# Altium PCB SmartSwitch2.0.PcbDoc
Units mil, origin at the board's own origin, x right, y up, seen from the top; angles counter-clockwise.
Board outline 5118.11 x 4173.23 mil, 2 copper layers (Top Layer, Bottom Layer); 68 components, 39 nets, 191 pads, 146 vias.
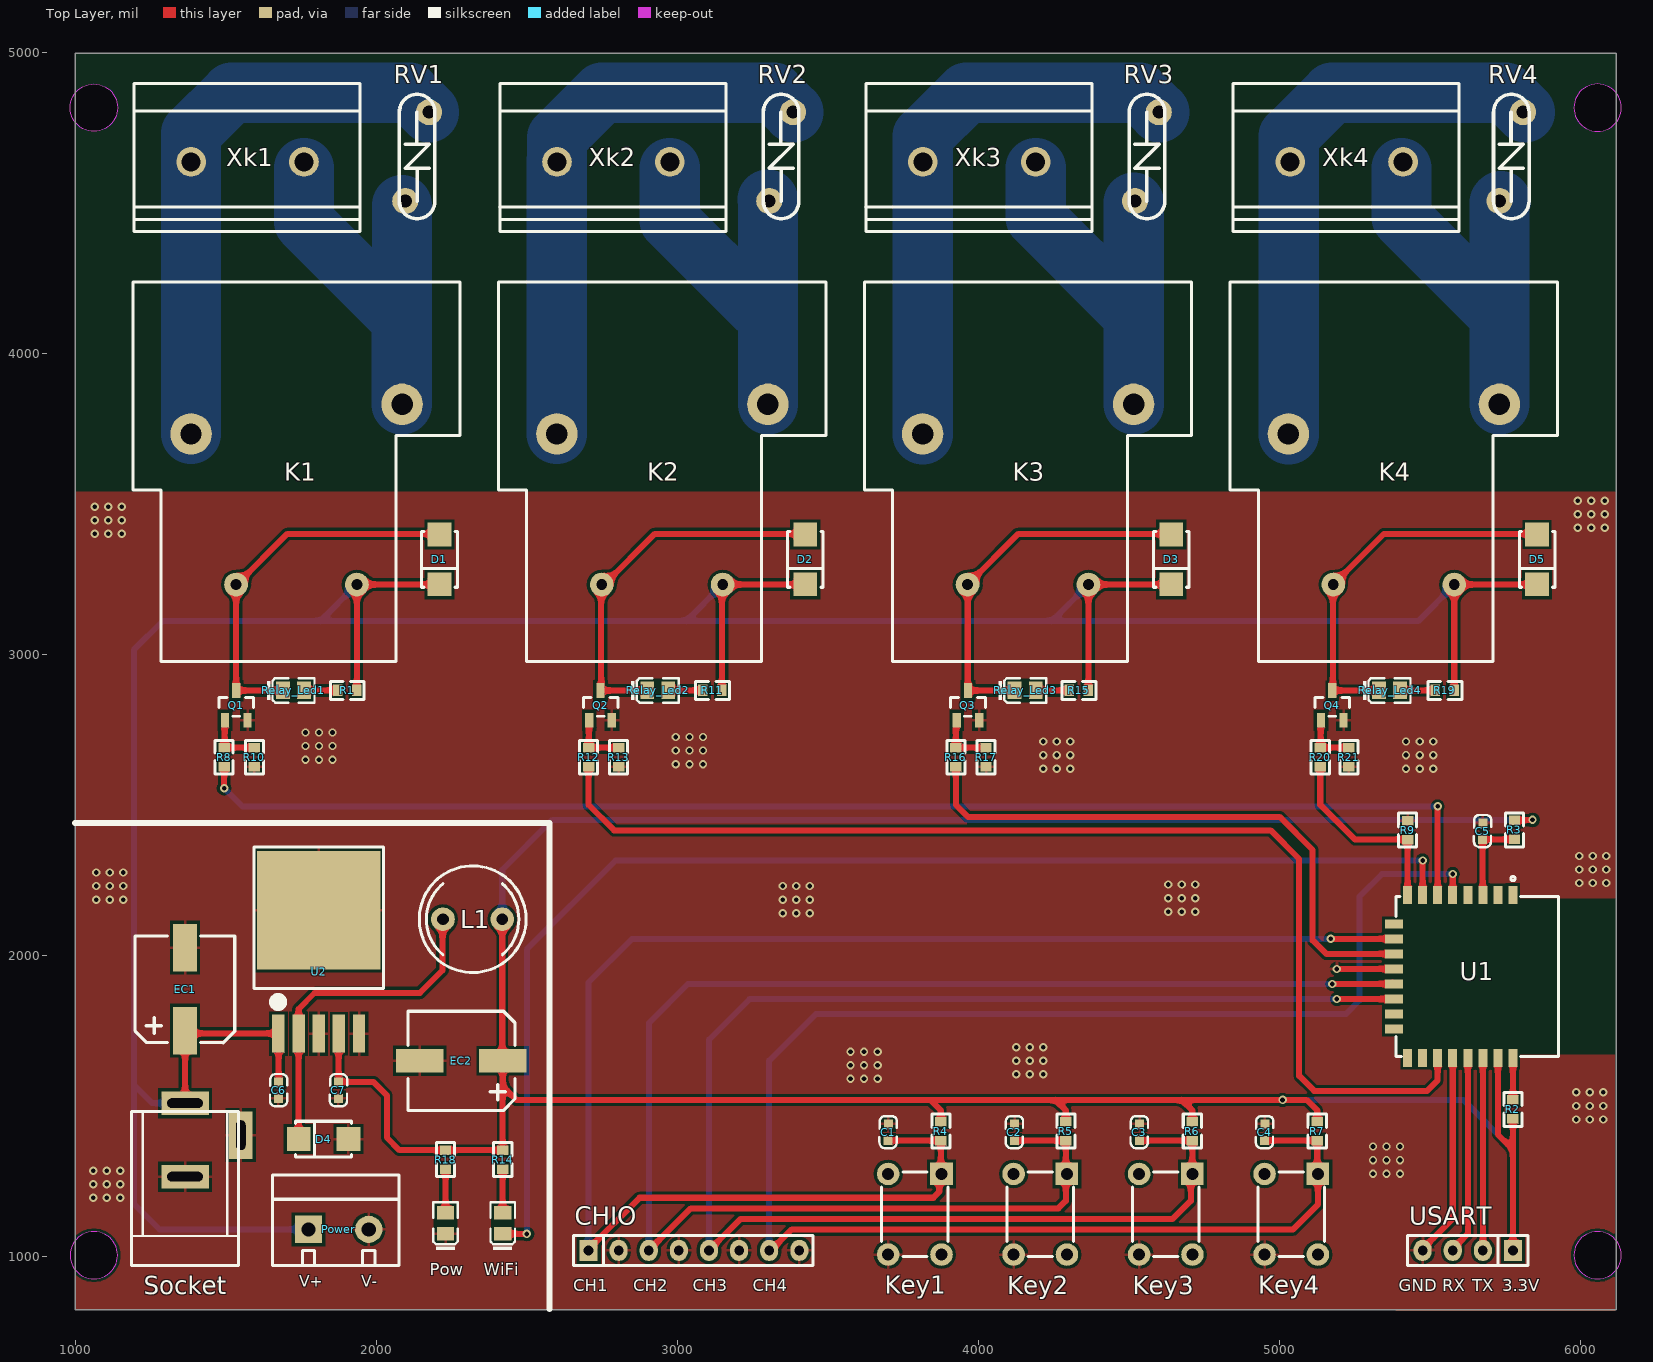
[diagram p0: Top Layer view]
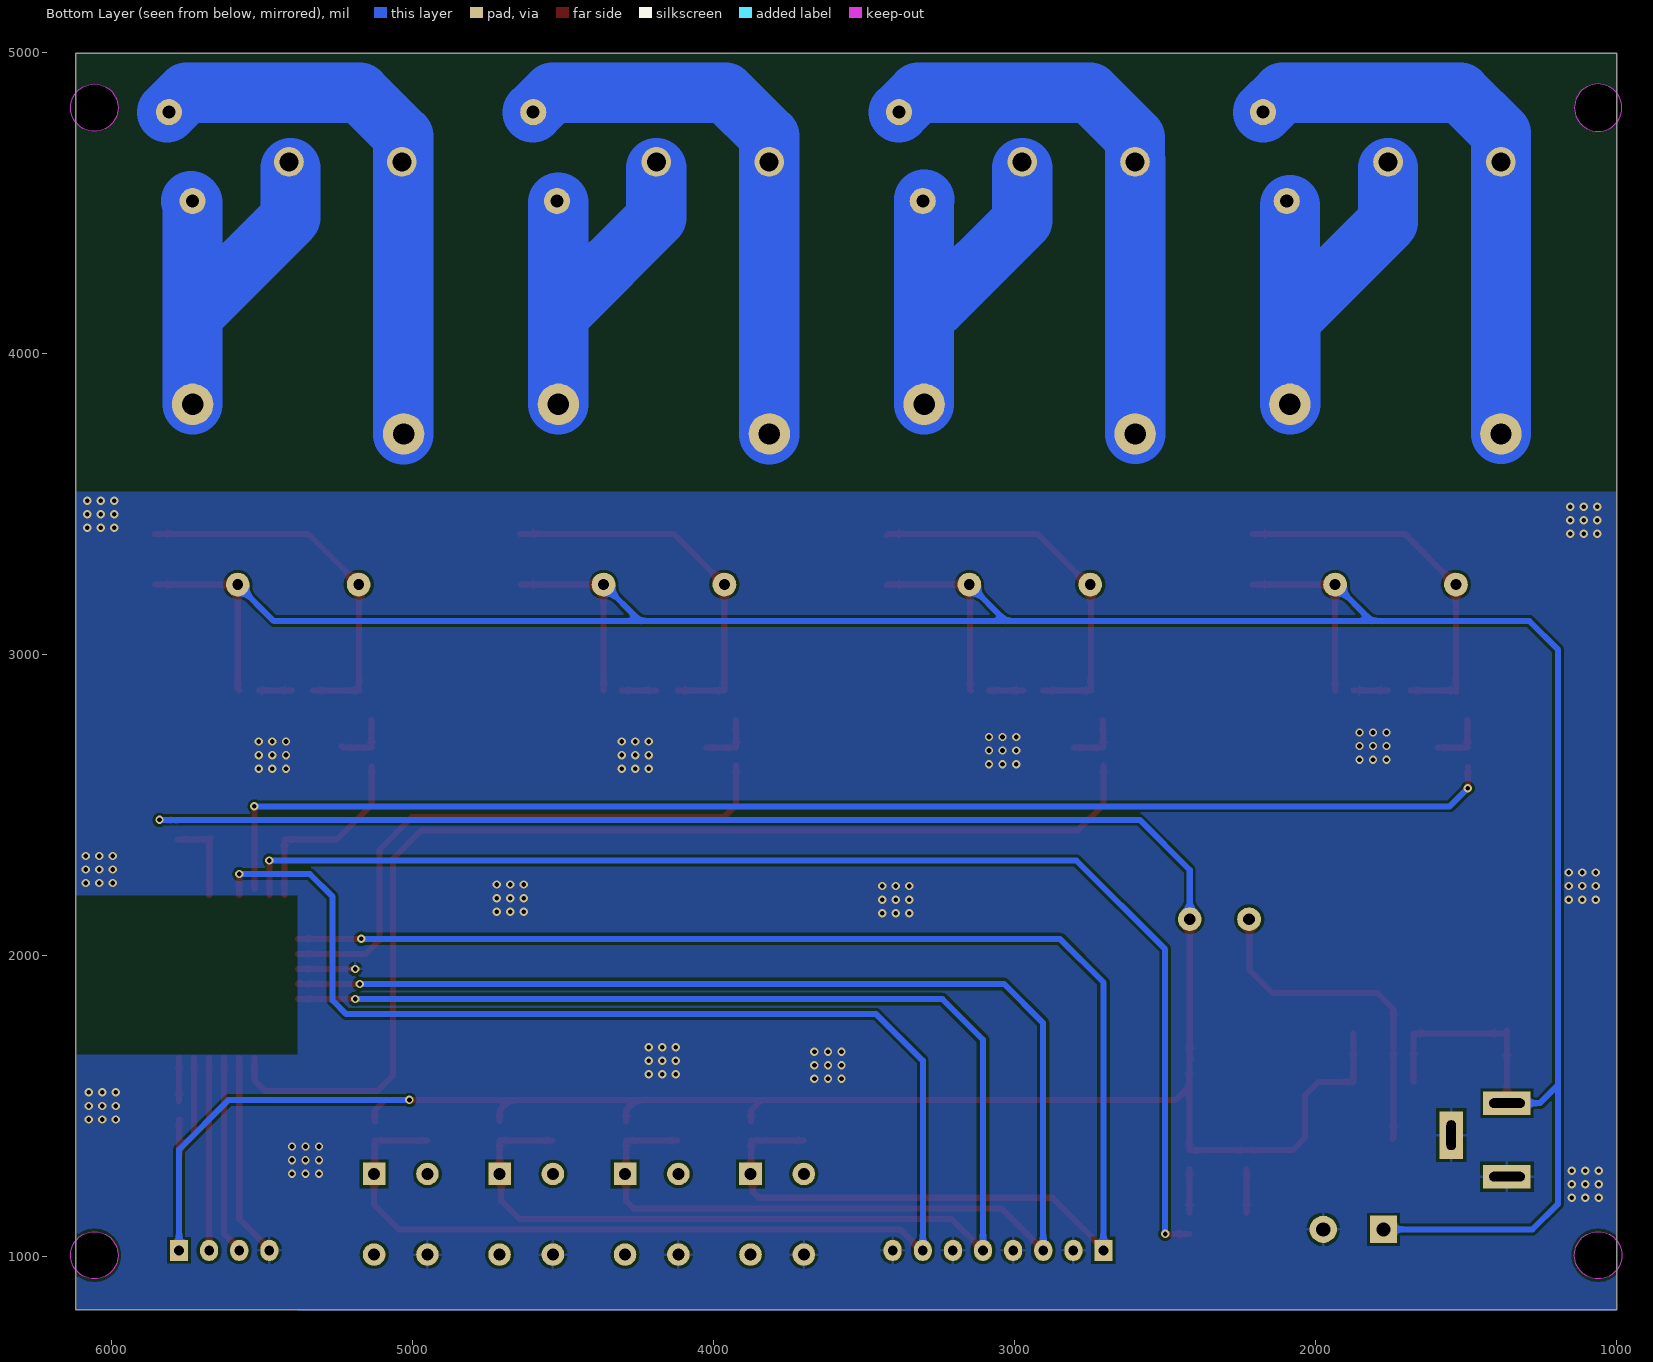
[diagram p1: Bottom Layer view, seen from below]

## Layer stack, top to bottom
Top Solder: solder mask 0.4, Solder Resist, Dk 3.5
Top Layer: signal copper 1.4
Dielectric 1: dielectric 12.6, FR-4, Dk 4.8
Bottom Layer: signal copper 1.4
Bottom Solder: solder mask 0.4, Solder Resist, Dk 3.5

## Board outline
1000,822.99 1000,4996.22 6118.11,4996.22 6118.11,822.99
cut-out: 5977.17,4815.12 ccw(c6055.91,4815.12) 6055.91,4736.38 ccw(c6055.91,4815.12) 6134.65,4815.12 ccw(c6055.91,4815.12) 6055.91,4893.86 ccw(c6055.91,4815.12)
cut-out: 5977.17,1004.09 ccw(c6055.91,1004.09) 6055.91,925.35 ccw(c6055.91,1004.09) 6134.65,1004.09 ccw(c6055.91,1004.09) 6055.91,1082.83 ccw(c6055.91,1004.09)
cut-out: 983.46,1004.09 ccw(c1062.2,1004.09) 1062.2,925.35 ccw(c1062.2,1004.09) 1140.94,1004.09 ccw(c1062.2,1004.09) 1062.2,1082.83 ccw(c1062.2,1004.09)
cut-out: 1062.2,4736.38 cw(c1062.2,4815.12) 983.46,4815.12 cw(c1062.2,4815.12) 1062.2,4893.86 cw(c1062.2,4815.12) 1140.94,4815.12 cw(c1062.2,4815.12)

## Design rules (kind name [scope] priority, off if disabled: settings)
Clearance [All] p1: gap=10 ignorepadtopadclearanceinfootprint=FALSE except(0: Arc-Hole Track-Hole SMDPad-Hole THPad-Hole Via-Hole Fill-Hole Poly-Hole Region-Hole Text-Hole)
PolygonConnect [All] p1: connectstyle=Relief reliefconductorwidth=10 reliefentries=4 polygonreliefangle="90 Angle" airgapwidth=10
RoutingVias [All] p1: holewidth=15.75 width=27.56 viastyle="Through Hole" minholewidth=15.75 minwidth=27.56 maxholewidth=15.75 maxwidth=27.56
SolderMaskExpansion [All] p1: expansion=4
Width [All] p1: maxlimit=200 minlimit=10 preferedwidth=10 minimp=50.000000 maximp=50.000000 favimp=50.000000
30 further rules are at their usual default settings.

## Components (designator, comment, footprint, x,y, rotation, side; value= is the part's Value field where it differs from the comment)
C1 "1nF" 0603C 3701.35,1440.21 r270 top
C2 "1nF" 0603C 4120.35,1440.21 r270 top
C3 "1nF" 0603C 4535.35,1440.21 r270 top
C4 "1nF" 0603C 4951.35,1440.21 r270 top
C5 "100nF" 0603C 5675.35,2440.21 r270 top
C6 "100nF" 0603C 1674.65,1524.79 r90 top
C7 "100nF" 0603C 1873.65,1524.79 r90 top
CHIO "Pin HDR1X8" "Pin HDR1X8/2.54mm-S" 2705,1020 r90 top
D1 "M7" SMA(DO-214AC)_S1 2210,3315 r90 top
D2 "M7" SMA(DO-214AC)_S1 3425,3315 r90 top
D3 "M7" SMA(DO-214AC)_S1 4640,3315 r90 top
D4 "SS34" SMA(DO-214AC)_S1 1825,1390 r0 top
D5 "M7" SMA(DO-214AC)_S1 5855,3315 r90 top
EC1 "470uF" SMD-EC8X8X10 1360,2020 r90 top
EC2 "470uF" SMD-EC8X8X10 2150,1645 r180 top
K1 "SRD-12V" SLA-xxVDC-SL-A 1735,3605.59 r0 top
K2 "SRD-12V" SLA-xxVDC-SL-A 2949.74,3605.59 r0 top
K3 "SRD-12V" SLA-xxVDC-SL-A 4164.48,3605.59 r0 top
K4 "SRD-12V" SLA-xxVDC-SL-A 5379.21,3605.59 r0 top
Key1 "KEY" DIP-6X6X4.3 3877.17,1274.12 r270 top
Key2 "KEY" DIP-6X6X4.3 4293.83,1274.12 r270 top
Key3 "KEY" DIP-6X6X4.3 4710.5,1274.12 r270 top
Key4 "KEY" DIP-6X6X4.3 5127.17,1274.12 r270 top
L1 "150uH" PK0810 2320,2120 r0 top
Pow "红灯 0805" 0805_LED_S1 2230,1110.16 r90 top
Power "KF301-2P" KF301-5.0-2P 1775,1090 r0 top
Q1 "SS8050 Y1" SOT-23(SOT-23-3) 1535,2830 r270 top
Q2 "SS8050 Y1" SOT-23(SOT-23-3) 2745,2830 r270 top
Q3 "SS8050 Y1" SOT-23(SOT-23-3) 3965,2830 r270 top
Q4 "SS8050 Y1" SOT-23(SOT-23-3) 5175,2830 r270 top
R1 "1.2K" 0603R 1935,2880 r180 top
R2 "10k" 0603R 5775,1457.01 r90 top
R3 "10k" 0603R 5780,2385 r90 top
R4 "10k" 0603R 3875,1447.99 r270 top
R5 "10k" 0603R 4290,1447.99 r270 top
R6 "10k" 0603R 4710,1447.99 r270 top
R7 "10k" 0603R 5125,1447.99 r270 top
R8 "1K" 0603R 1495,2627.01 r90 top
R9 "4.7K" 0603R 5425,2447 r270 top
R10 "4.7K" 0603R 1595,2627.01 r90 top
R11 "1.2K" 0603R 3147.99,2880 r180 top
R12 "1K" 0603R 2705,2627.01 r90 top
R13 "4.7K" 0603R 2805,2627.01 r90 top
R14 "1K" 0603R 2420,1352.99 r270 top
R15 "1.2K" 0603R 4365,2880 r180 top
R16 "1K" 0603R 3925,2627.01 r90 top
R17 "4.7K" 0603R 4025,2627.01 r90 top
R18 "1K" 0603R 2230,1352.99 r270 top
R19 "1.2K" 0603R 5580,2880 r180 top
R20 "1K" 0603R 5135,2627.01 r90 top
R21 "4.7K" 0603R 5230,2627.01 r90 top
Relay_Led1 "红灯 0805" 0805_LED_S1 1725,2880 r0 top
Relay_Led2 "红灯 0805" 0805_LED_S1 2935,2880 r0 top
Relay_Led3 "红灯 0805" 0805_LED_S1 4155.04,2880 r0 top
Relay_Led4 "红灯 0805" 0805_LED_S1 5365,2880 r0 top
RV1 "7D471K" Varistor-7.5mm 2096.26,4505 r90 top
RV2 "7D471K" Varistor-7.5mm 3305,4505 r90 top
RV3 "7D471K" Varistor-7.5mm 4520,4505 r90 top
RV4 "7D471K" Varistor-7.5mm 5730,4505 r90 top
Socket "DC_Socket" DC-005 1365,1509.09 r270 top
U1 "Comment" "PSF- B04" 6459.92,1929.84 r180 top
U2 "LM2596-3.3" TO263-5A 1808.86,1740 r0 top
USART "TTL" "Pin HDR1X4/2.54mm-S" 5775,1020 r270 top
WiFi "蓝灯 0805" 0805_LED_S1 2420,1110.16 r90 top
Xk1 "XK 9500" "XK 9500" 1569.8,4555 r0 top
Xk2 "XK 9500" "XK 9500" 2785,4555 r0 top
Xk3 "XK 9500" "XK 9500" 4000,4555 r0 top
Xk4 "XK 9500" "XK 9500" 5220,4555 r0 top

## Footprints (in the part's own frame and the unit in brackets; to place one, negate y for a bottom-side part, rotate by r counter-clockwise, add the part's x,y. Pads: shape width x height; smd on the part's side, far side on the other; paste and mask are expansions set on the pad)
0603C [mil]
  rect 30x30 smd: 1(0.21,-0.35) 2(55.21,-1.35)
  silkscreen extent -26,-30 81,28, body extent -1,-15 62,17, height 12
0603R [mm]
  rect 0.8x0.965 smd: 1(0,0) 2(1.6,0)
  silkscreen extent -0.64,-0.76 2.21,0.76, body extent -0.04,-0.41 1.56,0.41, height 0.45
0805_LED_S1 [mm]
  rect 1.16x1.47 smd: A(0.89,0) K(-0.89,0)
  silkscreen extent -2.24,-1.04 1.77,1.03, body extent -1.01,-0.62 1.01,0.62, height 1.1
DC-005 [mm] "5.5X2.1mm"
  rect 2x4 hole 0.8 slot 3 at 90 deg: 1(0,0) 2(6.2,0)
  rect 4x2 hole 0.8 slot 2.5 at 0 deg: 3(2.7,4.7)
  silkscreen extent 0.72,-4.5 13.7,4.5, body extent -0.4,-4.52 13.65,4.78, height 11.2
DIP-6X6X4.3 [mm]
  rect 1.9x1.9 hole 1: 1(0,0)
  round 1.9 hole 1: 2(0,-4.5) 3(6.8,-4.5) 4(6.8,0)
  silkscreen extent -0.16,-5.04 6.96,0.54, body extent -0.66,-5.25 7.55,0.75, height 4.25
KF301-5.0-2P [mm] "可拼接端子/6A"
  rect 2.3x2.3 hole 1.2: 1(0,0)
  round 2.3 hole 1.2: 2(5.08,0)
  silkscreen extent -3.05,-3.05 7.62,4.57, body extent -3,-3.09 7.5,4.51, height 10.05
"Pin HDR1X4/2.54mm-S" [mil]
  rect 70x60 hole 32: 1(0,0)
  oval 70x60 hole 32: 2(0,-100) 3(0,-200) 4(0,-300)
  silkscreen extent -50,-350 50,50, body extent -50,-350 50,50, height 336
"Pin HDR1X8/2.54mm-S" [mil]
  rect 70x60 hole 32: 1(0,0)
  oval 70x60 hole 32: 2(0,-100) 3(0,-200) 4(0,-300) 5(0,-400) 6(0,-500) 7(0,-600) 8(0,-700)
  silkscreen extent -50,-745 50,50, body extent -50,-750 50,50, height 336
PK0810 [mm] "5*9*12mm(脚距，直径，高）"
  round 2 hole 1: 1(-2.5,0) 2(2.5,0)
  silkscreen extent -4.5,-4.5 4.5,4.5, body extent -4.5,-4.55 4.5,4.44, height 12.02
"PSF- B04" [mil]
  rect 29.92x60 smd: 1(684.92,-270.16) 2(734.92,-270.16) 3(784.92,-270.16) 4(834.92,-270.16) 5(884.92,-270.16) 6(934.92,-270.16) 7(984.92,-270.16) 8(1034.92,-270.16) 17(1034.92,270.16) 18(984.92,270.16) 19(934.92,270.16) 20(884.92,270.16) 21(834.92,270.16) 22(784.92,270.16) 23(734.92,270.16) 24(684.92,270.16)
  rect 60x29.92 smd: 9(1080.08,-175) 10(1080.08,-125) 11(1080.08,-75) 12(1080.08,-25) 13(1080.08,25) 14(1080.08,75) 15(1080.08,125) 16(1080.08,175)
  silkscreen extent 533,-332 1073,265
SLA-xxVDC-SL-A [mm] "一组常开，长：32mm，宽：27.6mm，高：20mm"
  round 2 hole 0.9: 1(-5.1,-9.5) 2(5.1,-9.5)
  round 3.5 hole 1.8: 3(8.91,5.7) 4(-8.89,3.2)
  silkscreen extent -13.8,-16 13.8,16, body extent -13.84,-15.87 13.76,16.13, height 20.65
SMA(DO-214AC)_S1 [mm]
  rect 2x2 smd: 1(2.1,0) 2(-2.1,0)
  silkscreen extent -2.35,-1.5 2.35,1.5
SMD-EC8X8X10 [mm]
  rect 4x2 smd: 1(-6.858,-0.127) 2(0.142,-0.127)
  silkscreen extent -7.88,-4.32 1.12,4.08, body extent -8.38,-4.28 1.52,4.02, height 10.2
SOT-23(SOT-23-3) [mm]
  rect 1.25x0.7 smd: 1(1.25,-0.95) 2(1.25,0.95) 3(-1.25,0)
  silkscreen extent -0.65,-1.46 0.9,1.46, body extent -1.5,-1.5 1.5,1.5, height 1.3
TO263-5A [mm] "263，5脚晶体管"
  rect 1.05x3.2 smd: 1(-3.4,0) 2(-1.7,0) 3(0,0) 4(1.7,0) 5(3.4,0)
  rect 10.45x10 smd: 3(0,10.414)
  silkscreen extent -5.46,2.29 5.46,15.75, body extent -5.05,0.45 4.95,13.78, height 4.5
Varistor-7.5mm [mm]
  round 2.2 hole 1.1: 1(0,0) 2(7.5,-2)
  silkscreen extent -1.5,-2.5 9,0.5, body extent -1.6,-2.8 9.1,0.8, height 11.2
"XK 9500" [mm]
  round 2.5 hole 1.6: 1(-4.694,2.032) 2(4.826,2.032)
  silkscreen extent -9.53,-3.84 9.56,8.66, body extent -1.4,4.44 -1.4,4.44, height 0.25

## Part data
C1 C2 C3 C4 C5 C6 C7: library part CAP, "无极性电容"
D1 D2 D3 D5: library part "SMA(DO-214AC) M7", "二极管", Package=SMA(DO-214AC), SuppliersPartNumber=C95872, ComponentLink1Description=供应商, ComponentLink1URL=http://www.szlcsc.com/product/details_2841.html, Supplier=LC, 备注="1N4007 4007 编号C2464 已经停售, 使用新"
D4: library part "SMA(DO-214AC) SS54", "二极管", Package=SMA(DO-214AC), SuppliersPartNumber=C22452, ComponentLink1Description=供应商, ComponentLink1URL=http://www.szlcsc.com/product/details_23178.html, Supplier=LC
EC1 EC2: library part SMD_ECAP, "贴片电解电容"
K1 K2 K3 K4: library part SLA-12VDC-SL-A, "12V一组常开"
L1: library part INDUCTOR, "INDUCTOR"
Pow Relay_Led1 Relay_Led2 Relay_Led3 Relay_Led4: library part "0805 红灯", "发光二极管", Package=0805, SuppliersPartNumber=C2295, ComponentLink1Description=供应商, ComponentLink1URL=http://www.szlcsc.com/product/details_2668.html, Supplier=LC
Q1 Q2 Q3 Q4: library part "SOT-23 SS8050 Y1", "三极管", Package=SOT-23, SuppliersPartNumber=C2150, ComponentLink1Description=供应商, ComponentLink1URL=http://www.szlcsc.com/product/details_2507.html, Supplier=LC
R1 R2 R3 R4 R5 R6 R7 R8 R9 R10 R11 R12 R13 R14 R15 R16 R17 R18 R19 R20 R21: library part RES
RV1 RV2 RV3 RV4: library part Varistor, "压敏电阻"
U2: "DC降压芯片"
USART: library part "Pin HDR1X4"
WiFi: library part "0805 蓝灯", "发光二极管", Package=0805, SuppliersPartNumber=C2293, ComponentLink1Description=供应商, ComponentLink1URL=http://www.szlcsc.com/product/details_2666.html, Supplier=LC

## Via types
v1: diameter 27.56, hole 15.75, Top Layer to Bottom Layer, tented both sides, 146 vias

## Nets (pads, with @x,y where several pads share a name; then routed paths per layer and width w, separated by ;. In a path a pad name is that pad's centre, name@x,y a point inside that pad or via, vN(x,y) a via of type N, cw(c..) or ccw(c..) an arc to the next point about the centre after c; other vN are vias at no path point)
3.3V: C7.2 EC2.1 L1.2 R2.1 R3.2 R4.1 R5.1 R6.1 R7.1 R14.1 R18.1 U1.23 U2.4 USART.1 | length 10339.2
  Top Layer w20: U2.4 1875,1739.21 C7.2 1990,1580 2035,1535 2035,1395 2077.01,1352.99 R18.1 R14.1 2420,1565 ; EC2.1@2415,1655 2418.43,1658.43 L1.2 ; EC2.1 2420,1565 ; 3845,1520 4255,1520 ; R4.1 3875,1485 3840,1520 2465,1520 2420,1565 ; R5.1 4290,1485 4255,1520 ; R6.1 4710,1485 4675,1520 ; R7.1@5122.01,1447.99 R7.1 ; R7.1@5125,1450 5125,1485 5090,1520 v1(5010,1520) 4675,1520 ; U1.23 5725,1405 5775,1355 ; USART.1 5775,1355 ; R2.1@5775,1455 5769.74,1455 5775,1449.74 5775,1355 ; R3.2@5782.99,2445 R3.2 5781,2449 5839,2449 v1(5840,2450) ; 4255,1520 4675,1520
  Bottom Layer w20: L1.2@2415,2115 2415,2116.57 L1.2 2418.43,2283.43 2585,2450 v1(5840,2450) ; v1(5010,1520) 5610,1520 5775,1355 5775,1025 USART.1@5780,1020
12V: C6.2 D1.2 D2.2 D3.2 D5.2 EC1.1 K1.2 K2.2 K3.2 K4.2 Power.1 R1.1 R11.1 R15.1 R19.1 Socket.1 U2.1 | length 10873.6
  Top Layer w20: Socket.1@1365,1510 EC1.1 1374.33,1740.67 1664.33,1740.67 U2.1@1675,1730 ; C6.2@1675,1580 1675.5,1580.5 1675.5,1739.5 U2.1 ; R1.1 1935.39,2880.39 1935.39,3231.18 K1.2 2208.43,3231.57 D1.2@2210,3230 ; R11.1@3145,2880 3147.76,2882.76 3147.76,3227.76 K2.2@3150,3230 ; K2.2 3423.43,3231.57 D2.2@3425,3230 ; K3.2@4360,3230 4361.57,3231.57 K3.2 4639.25,3231.57 D3.2 ; R15.1 4365.13,2880.13 4365.13,3229.87 K3.2@4365,3230 ; R19.1@5575,2880 5580,2885 K4.2@5580,3230 ; K4.2 K4.2@5580,3230 ; D5.2 5854.25,3231.57 5581.57,3231.57 K4.2@5580,3230
  Bottom Layer w20: Socket.1 1255.91,1509.09 1195,1570 ; Power.1 1280,1090 1195,1175 1195,1570 ; K1.2 1814.21,3110 ; K2.2 3028.95,3110 ; K3.2 4243.69,3110 ; K4.2@5580,3230 5460,3110 4243.69,3110 ; 1195,1570 1195,1585 1195,3015 1290,3110 1814.21,3110 ; 1814.21,3110 3028.95,3110 ; 3028.95,3110 4243.69,3110
CH1: C1.2 CHIO.1 Key1.1 R4.2 U1.10 | length 5238
  Top Layer w20: CHIO.1@2700,1020 2875,1195 3850,1195 3870,1215 3870,1266.95 Key1.1@3875,1271.95 ; C1.2 R4.2 Key1.1@3875,1271.95 ; Key1.1@3875,1270 Key1.1@3875,1271.95 ; Key1.1 Key1.1@3875,1271.95 ; v1(5170,2055) 5379.69,2055 U1.10
  Bottom Layer w20: CHIO.1 2705,1910 2850,2055 v1(5170,2055) ; Key1.1@3870,1281.28 Key1.1
CH2: C2.2 CHIO.3 Key2.1 R5.2 U1.13 | length 5112.2
  Top Layer w20: CHIO.3 3045,1160 4265,1160 4290,1185 R5.2 C2.2 ; v1(5175,1905) 5369.69,1905 5374.69,1910 U1.13
  Bottom Layer w20: CHIO.3 2905,1775 3035,1905 v1(5175,1905)
CH3: C3.2 CHIO.5 Key3.1 R6.2 U1.14 | length 5081.6
  Top Layer w20: CHIO.5 3210,1125 4645,1125 4705,1185 4705,1268.62 Key3.1@4710,1273.62 ; C3.2 R6.2 Key3.1@4710,1273.62 ; Key3.1@4710,1270 Key3.1@4710,1273.62 ; Key3.1 Key3.1@4710,1273.62 ; v1(5190,1855) 5379.69,1855 U1.14
  Bottom Layer w20: CHIO.5 3105,1720 3240,1855 v1(5190,1855)
CH4: C4.2 CHIO.7 Key4.1 R7.2 U1.5 | length 5706.1
  Top Layer w20: CHIO.7@3300,1020 CHIO.7 3310,1020 3380,1090 5045,1090 5127.17,1172.17 Key4.1 ; C4.2 R7.2 Key4.1@5125,1275 ; U1.5 v1(5575,2270)
  Bottom Layer w20: CHIO.7 3305,1650 3460,1805 5220,1805 5265,1850 5265,2195 5340,2270 v1(5575,2270)
GND: C1.1 C2.1 C3.1 C4.1 C5.1 C6.1 C7.1 CHIO.2 CHIO.4 CHIO.6 CHIO.8 D4.1 EC1.2 EC2.2 Key1.3 Key2.3 Key3.3 Key4.3 Pow.K Power.2 Q1.2 Q2.2 Q3.2 Q4.2 R9.1 R10.1 R13.1 R17.1 R21.1 Socket.2 Socket.3 U1.12 U1.20 U2.3 U2.5 USART.4 | length 871
  Top Layer w20: v1(5190,1955) 5379.69,1955 U1.12 ; USART.4 5475,1025 5575,1125 U1.20
  other v1: 1060,1195 1105,1195 1150,1195 1060,1240 1105,1240 1150,1240 5310,1275 5355,1275 5400,1275 1060,1285 1105,1285 1150,1285 5310,1320 5355,1320 5400,1320 5310,1365 5355,1365 5400,1365 5985,1455 6030,1455 6075,1455 5985,1500 6030,1500 6075,1500 5985,1545 6030,1545 6075,1545 3575,1590 3620,1590 3665,1590 4125,1605 4170,1605 4215,1605 3575,1635 3620,1635 3665,1635 4125,1650 4170,1650 4215,1650 3575,1680 3620,1680 3665,1680 4125,1695 4170,1695 4215,1695 3350,2140 3395,2140 3440,2140 4630,2145 4675,2145 4720,2145 1070,2185 1115,2185 1160,2185 3350,2185 3395,2185 3440,2185 4630,2190 4675,2190 4720,2190 1070,2230 1115,2230 1160,2230 3350,2230 3395,2230 3440,2230 4630,2235 4675,2235 4720,2235 5995,2240 6040,2240 6085,2240 1070,2275 1115,2275 1160,2275 5995,2285 6040,2285 6085,2285 5995,2330 6040,2330 6085,2330 4215,2620 4260,2620 4305,2620 5420,2620 5465,2620 5510,2620 2995,2635 3040,2635 3085,2635 1765,2650 1810,2650 1855,2650 4215,2665 4260,2665 4305,2665 5420,2665 5465,2665 5510,2665 2995,2680 3040,2680 3085,2680 1765,2695 1810,2695 1855,2695 4215,2710 4260,2710 4305,2710 5420,2710 5465,2710 5510,2710 2995,2725 3040,2725 3085,2725 1765,2740 1810,2740 1855,2740 1065,3400 1110,3400 1155,3400 5990,3420 6035,3420 6080,3420 1065,3445 1110,3445 1155,3445 5990,3465 6035,3465 6080,3465 1065,3490 1110,3490 1155,3490 5990,3510 6035,3510 6080,3510
NetC5_2: C5.2 R3.1 U1.3 | length 297.1
  Top Layer w20: C5.2@5670,2390 5674.5,2385.5 5674.5,2200.5 U1.3 ; C5.2@5675,2385 R3.1
NetD1_1: D1.1 K1.1 Q1.3 Relay_Led1.K | length 1252.8
  Top Layer w20: Q1.3@1535,2875 1534.61,2875.39 1534.61,3231.18 K1.1 1536.57,3231.57 1705,3400 D1.1@2210,3400 ; Q1.3 1535.39,2879.61 1684.61,2879.61 Relay_Led1.K@1685,2880
NetD2_1: D2.1 K2.1 Q2.3 Relay_Led2.K | length 1261.4
  Top Layer w20: Q2.3 2745.39,2879.61 2904.61,2879.61 Relay_Led2.K@2905,2880 ; Q2.3@2745,2880 2746.98,2881.98 2746.98,3229.6 K2.1 2756.57,3231.57 2925,3400 3420,3400 D2.1@3425,3395
NetD3_1: D3.1 K3.1 Q3.3 Relay_Led3.K | length 1258.5
  Top Layer w20: Q3.3 3965.39,2879.61 4119.61,2879.61 Relay_Led3.K ; Q3.3@3965,2880 3964.34,2880.66 3964.34,3230.92 K3.1 4132.11,3400 D3.1@4645,3400
NetD4_2: D4.2 L1.1 U2.2 | length 1134.3
  Top Layer w20: D4.2@1745,1390 1741.93,1393.07 U2.2 1741.93,1821.93 1795,1875 2145,1875 2220,1950 L1.1@2220,2120
NetD5_1: D5.1 K4.1 Q4.3 Relay_Led4.K | length 1254.7
  Top Layer w20: Q4.3 5175.39,2879.61 5329.61,2879.61 Relay_Led4.K ; Q4.3@5175,2880 5176.71,2881.71 5176.71,3229.86 K4.1 5346.85,3400 D5.1@5855,3400
NetK1_3: K1.3 RV1.1 Xk1.2 | length 1580.5
  Bottom Layer w200: Xk1.2@1759.8,4615 1759.8,4435.2 2085,4110 K1.3@2085,3830 ; K1.3 2085.79,4110 RV1.1@2085.79,4490.79
NetK1_4: K1.4 RV1.2 Xk1.1 | length 1871.3
  Bottom Layer w200: K1.4 Xk1.1 1385,4730 1520,4865 2110,4865 RV1.2@2175,4800
NetK2_3: K2.3 RV2.1 Xk2.2 | length 1258.3
  Bottom Layer w200: Xk2.2@2975,4615 2975,4440 3260,4155 ; RV2.1@3300,4510 3300.52,4509.48 3300.52,4155 K2.3
NetK2_4: K2.4 RV2.2 Xk2.1 | length 1862.5
  Bottom Layer w200: K2.4 2599.74,4639.74 Xk2.1@2600,4640 ; Xk2.1 2600.2,4715.2 2750,4865 3320,4865 RV2.2@3385,4800
NetK3_3: K3.3 RV3.1 Xk3.2 | length 1282.5
  Bottom Layer w200: Xk3.2@4190,4615 4190,4450 4485,4155 4515,4155 ; K3.3 RV3.1@4515.26,4500.26
NetK3_4: K3.4 RV3.2 Xk3.1 | length 1862
  Bottom Layer w200: K3.4@3815,3730 3815.2,3730.2 Xk3.1 3815.2,4720.2 3960,4865 4535,4865 RV3.2@4600,4800
NetK4_3: K4.3 RV4.1 Xk4.2 | length 1289.2
  Bottom Layer w200: Xk4.2@5405,4615 5405,4450 5700,4155 5730,4155 ; K4.3@5730.26,3830 5730.26,4500.26 RV4.1@5735,4505
NetK4_4: K4.4 RV4.2 Xk4.1 | length 1862
  Bottom Layer w200: K4.4@5030,3730 5030.2,3730.2 5030.2,4720.2 5175,4865 5750,4865 RV4.2@5815,4800
NetPow_A: Pow.A R18.2 | length 145
  Top Layer w20: Pow.A@2230,1145 Pow.A R18.2
NetQ1_1: Q1.1 R8.2 R10.2 | length 191.9
  Top Layer w20: Q1.1 1496.3,2779.49 1496.3,2691.3 R8.2 R10.2
NetQ2_1: Q2.1 R12.2 R13.2 | length 191.9
  Top Layer w20: Q2.1 2706.3,2779.49 2706.3,2691.3 R12.2 R13.2
NetQ3_1: Q3.1 R16.2 R17.2 | length 191.9
  Top Layer w20: Q3.1 3925,2778.19 R16.2 R17.2
NetQ4_1: Q4.1 R20.2 R21.2 | length 193.9
  Top Layer w20: Q4.1 5136.3,2779.49 5136.3,2691.3 R20.2 R21.2 R21.2@5235,2695
NetR1_2: R1.2 Relay_Led1.A | length 115
  Top Layer w20: Relay_Led1.A R1.2@1875,2880
NetR2_2: R2.2 U1.24 | length 144.7
  Top Layer w20: R2.2@5775,1515 R2.2 U1.24
NetR11_2: R11.2 Relay_Led2.A | length 115
  Top Layer w20: Relay_Led2.A R11.2
NetR14_2: R14.2 WiFi.A | length 145
  Top Layer w20: WiFi.A@2420,1145 R14.2
NetR15_2: R15.2 Relay_Led3.A | length 114.9
  Top Layer w20: Relay_Led3.A R15.2 R15.2@4305,2880
NetR19_2: R19.2 Relay_Led4.A | length 110
  Top Layer w20: Relay_Led4.A R19.2@5510,2880
Relay1: R8.1 U1.6 | length 4399.9
  Top Layer w20: v1(1495,2555) R8.1@1495,2625 ; U1.6@5525,2220 v1(5525,2495)
  Bottom Layer w20: v1(1495,2555) 1555,2495 v1(5525,2495)
Relay2: R12.1 U1.19 | length 3854.5
  Top Layer w20: R12.1@2705,2630 R12.1 2705,2500 2790,2415 4970,2415 5065,2320 5065,1600 5115,1550 5490,1550 5525,1585 U1.19
Relay3: R16.1 U1.11 | length 1965.7
  Top Layer w20: R16.1@3925,2630 R16.1 3925,2500 3965,2460 5000,2460 5110,2350 5110,2050 5155.16,2004.84 U1.11
Relay4: R9.2 R20.1 U1.8 | length 649.1
  Top Layer w20: R20.1 5135,2500 5250,2385 5424.01,2385 R9.2 U1.8
RX: U1.21 USART.3 | length 660.4
  Top Layer w20: USART.3 5575,1025 5625,1075 U1.21
Status_LED: U1.7 WiFi.K | length 4237.2
  Top Layer w20: WiFi.K@2420,1075 2420.06,1075.06 2499.94,1075.06 v1(2500,1075) ; U1.7 v1(5475,2315)
  Bottom Layer w20: v1(2500,1075) 2500,2020 2795,2315 v1(5475,2315)
TX: U1.22 USART.2 | length 639.7
  Top Layer w20: USART.2 U1.22
pads on no net: Key1.2 Key1.4 Key2.2 Key2.4 Key3.2 Key3.4 Key4.2 Key4.4 U1.1 U1.2 U1.4 U1.9 U1.15 U1.16 U1.17 U1.18

## Polygon pours and split planes (outlines as drawn)
GND on Top Layer "Top Layer-GND" (solid, pour order 16): 5380,1670 6120,1670 6115,1665 6115,820 5385,820 5380,825
GND on Top Layer "Top Layer-GND 1" (solid, pour order 14): 5380,2190 6120,2190 6120,3540 5380,3540
GND on Top Layer "Top Layer-GND 2" (solid, pour order 2): 1000,3540 5380,3540 5380,825 1000,825
GND on Top Layer "Top Layer-GND 3" (solid, pour order 0): 1000,3540
GND on Bottom Layer "Bottom Layer-GND" (solid, pour order 12): 5380,1670 6120,1670 6115,1665 6115,825 5380,825
GND on Bottom Layer "Bottom Layer-GND 1" (solid, pour order 10): 5380,3540 6120,3540 6120,2200 5380,2200
GND on Bottom Layer "Bottom Layer-GND 2" (solid, pour order 8): 1000,3540 5380,3540 5380,820 1000,820

## Silkscreen, mask and mechanical layers (free items; w line width, h text height)
Top Overlay:
  lines w20: 1000,2440 2574.8,2440 ; 2575,825 2575,2440
  text "V+" at 1745,885.79 h65
  text "V-" at 1950,885.79 h65
  text "CH1" at 2655,885 h40
  text "CH2" at 2853.33,885 h40
  text "CH3" at 3051.67,885 h40
  text "CH4" at 3250,885 h40
  text "GND" at 5395,885 h40
  text "RX" at 5540,885 h40
  text "TX" at 5640,885 h40
  text "3.3V" at 5740,885 h40
Bottom Solder:
  lines w200: 1385,3730 1385,4635 1385,4730 1520,4865 2110,4865 2175,4800 ; 1760,4615 1760,4435 2075,4120 2080,4120 ; 2085,3830 2085,4490 ; 2600,3730 2600,4715 2750,4865 3320,4865 3385,4800 ; 2975,4615 2975,4440 3295,4120 ; 3300,3830 3300,4510 ; 3815,3725 3815,4630 3815,4720 3960,4865 4535,4865 4600,4800 ; 4190,4615 4190,4450 4510,4130 4510,4125 ; 4515,3830 4515,4500 ; 5030,3730 5030,4720 5175,4865 5285,4865 5750,4865 5815,4800 ; 5405,4615 5405,4450 5485,4370 5555,4300 5730,4125 5730,3830 ; 5730,4130 5730,4500 5735,4505
Mechanical 1:
  circle w10: c1062.2,4815.12 r78.74
  circle w10: c1062.2,1004.09 r78.74
  circle w10: c6055.91,1004.09 r78.74
  circle w10: c6055.91,4815.12 r78.74
  lines w10: 1000,822.99 1000,4996.22 6118.11,4996.22 6118.11,822.99 1000,822.99